# Altium PCB PCB1.PcbDoc
Units mm, origin at the board's own origin, x right, y up, seen from the top; angles counter-clockwise.
Board outline 26.5 x 24.9 mm, 2 copper layers (Top Layer, Bottom Layer); 36 components, 25 nets, 134 pads, 12 vias.
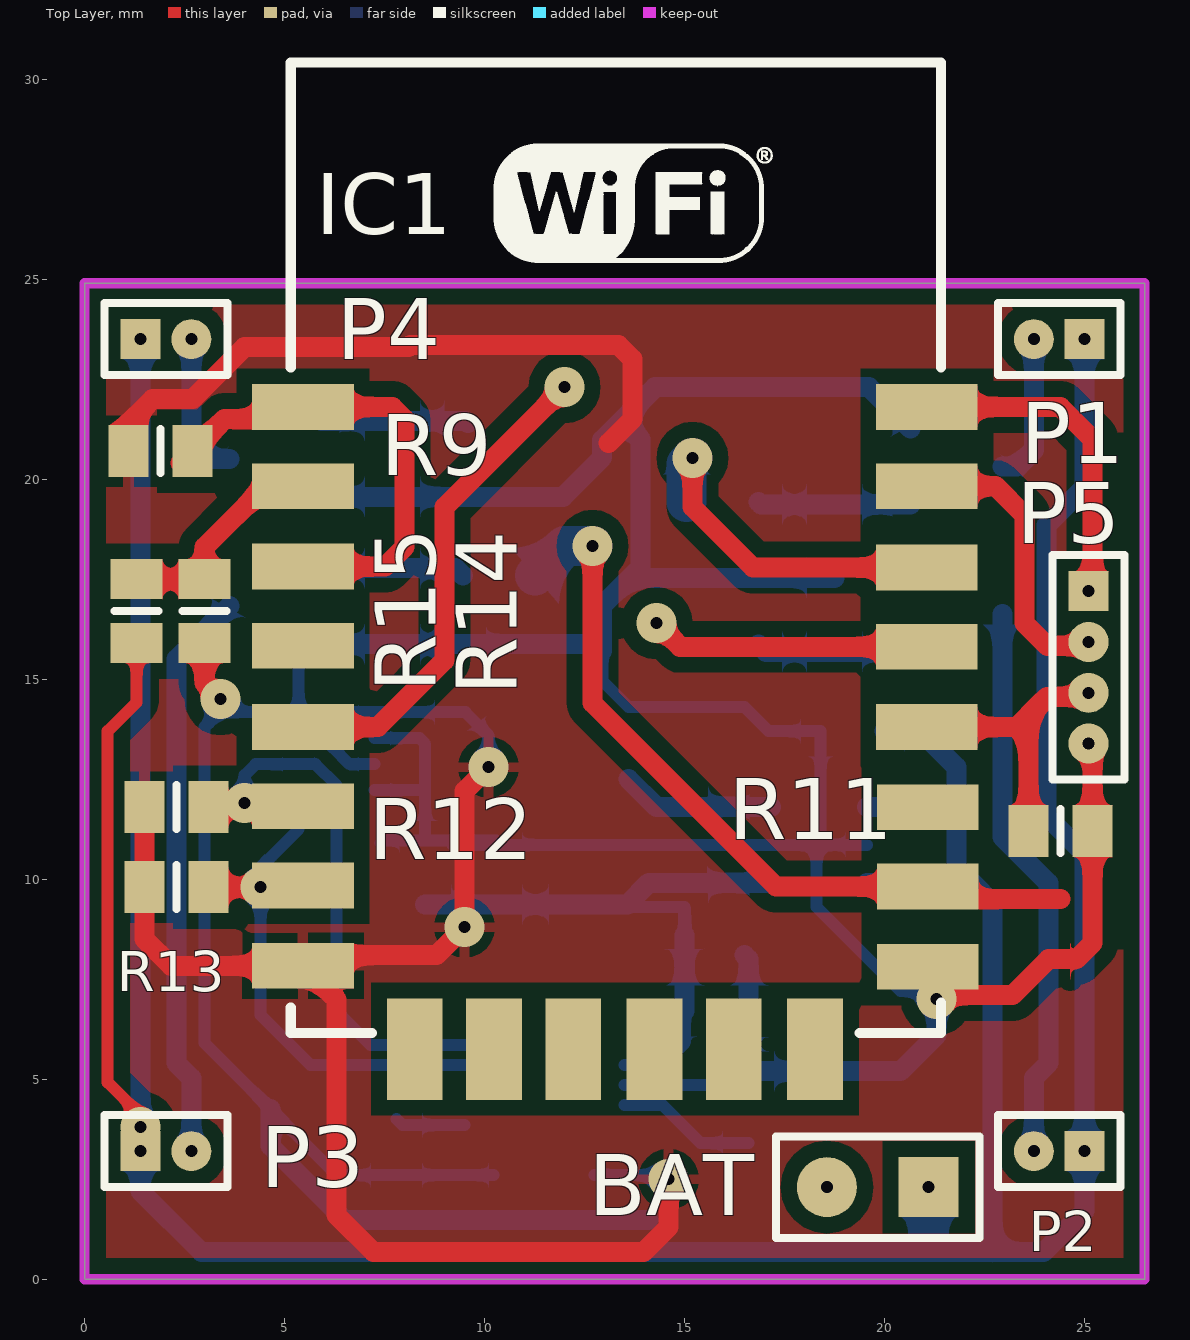
[diagram p0: Top Layer view]
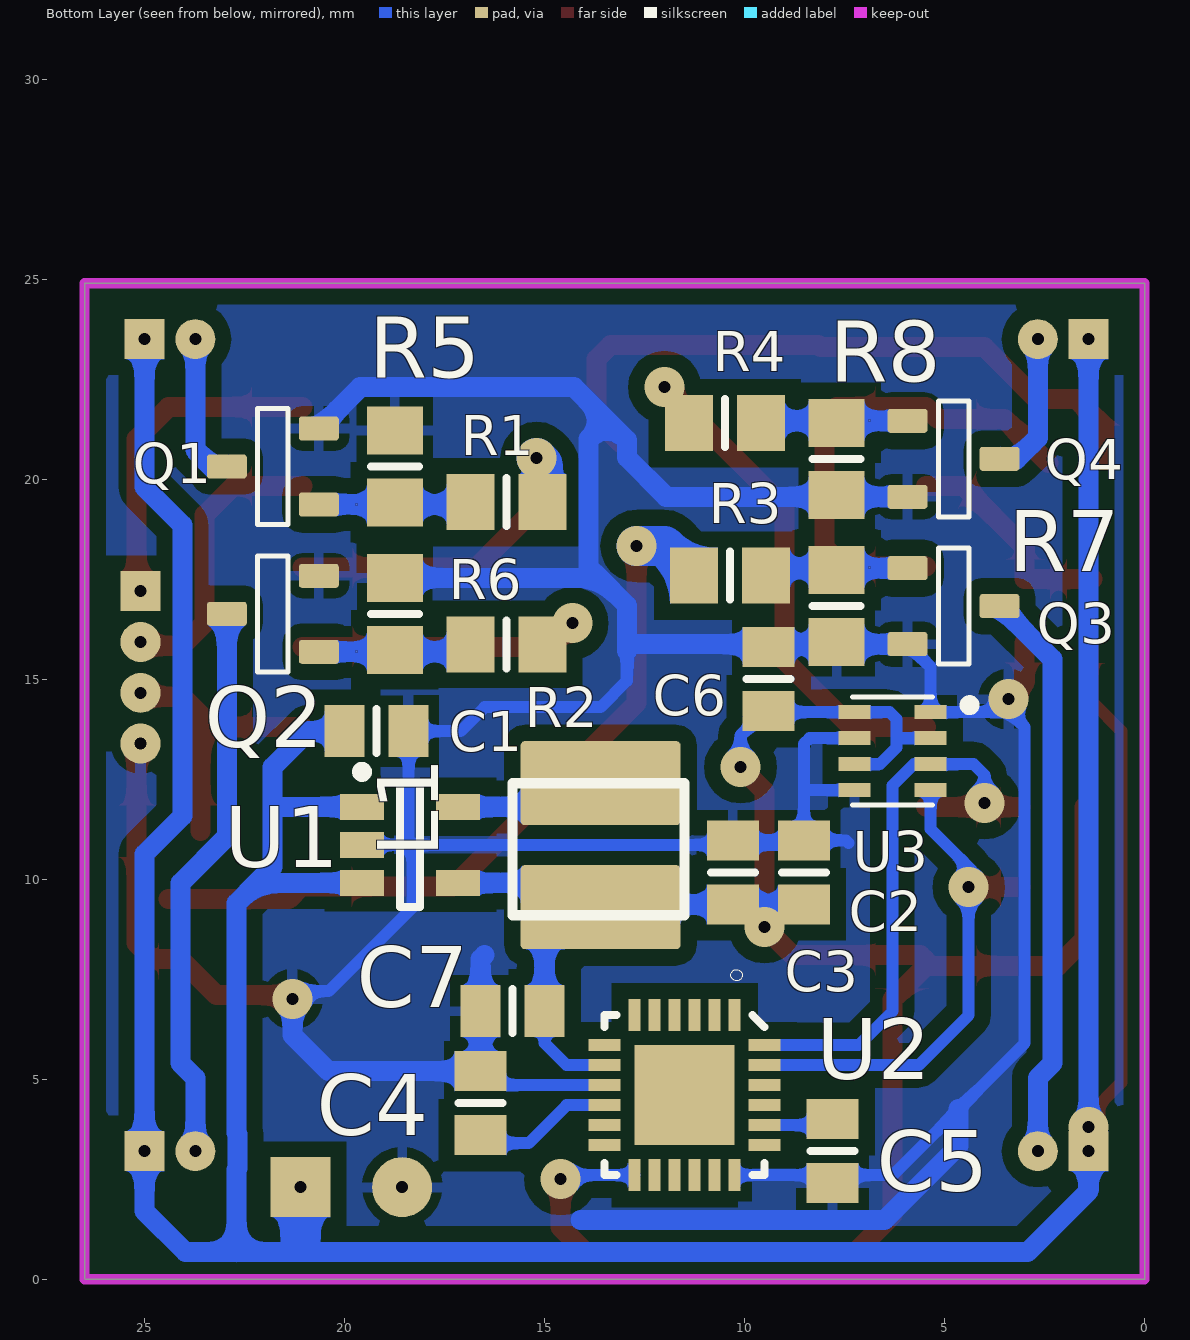
[diagram p1: Bottom Layer view, seen from below]

## Layer stack, top to bottom
Top Solder: solder mask 0.0102, Solder Resist, Dk 3.5
Top Layer: signal copper 0.0356
Dielectric 1: dielectric 0.32, FR-4, Dk 4.8
Bottom Layer: signal copper 0.0356
Bottom Solder: solder mask 0.0102, Solder Resist, Dk 3.5

## Board outline
0,0 26.5,0 26.5,24.9 0,24.9

## Design rules (kind name [scope] priority, off if disabled: settings)
Clearance [All] p1: gap=0.3 except(0.15: SMDPad-SMDPad; 0.2: Arc-SMDPad Track-SMDPad; 0.256: THPad-THPad; 0.4: Arc-Poly Track-Poly SMDPad-Poly THPad-Poly Via-Poly Fill-Poly Poly-Poly)
PolygonConnect [All] p1: connectstyle=Relief reliefconductorwidth=0.254 reliefentries=4 polygonreliefangle="90 Angle" airgapwidth=0.254
RoutingVias [All] p1: holewidth=0.711 width=1.27 viastyle="Through Hole" minholewidth=0.711 minwidth=1.27 maxholewidth=0.711 maxwidth=1.27
SolderMaskExpansion [All] p1: expansion=0.102
Width [All] p1: maxlimit=1 minlimit=0.254 preferedwidth=0.5
30 further rules are at their usual default settings.

## Components (designator, comment, footprint, x,y, rotation, side; value= is the part's Value field where it differs from the comment)
BAT "Header 2" HDR1X2 21.1,2.3 r180 top (schematic designator P6)
C1 "Cap" 6-0805_L 19.2,13.7 r0 bottom
C2 "Cap" 6-0805_L 8.517,10.169 r270 bottom
C3 "Cap" 6-0805_L 10.295,10.169 r270 bottom
C4 "Cap" 6-0805_L 16.6,4.4 r270 bottom
C5 "Cap" 6-0805_L 7.8,3.2 r90 bottom
C6 "Cap" 6-0805_L 9.4,15 r270 bottom
C7 "Cap" 6-0805_L 15.8,6.7 r180 bottom
IC1 "ESP8266 ESP-12-E" "ESP8266 ESP-12-E B" 22.047,5.396 r0 top
L1 "Inductor Iron Dot" "Inductor CD43" 11.6,13.4 r0 bottom
P1 "MHDR1X2" MHDR1X2 25,23.5 r180 top
P2 "MHDR1X2" MHDR1X2 25,3.2 r180 top
P3 "MHDR1X2" MHDR1X2 1.4,3.2 r0 top
P4 "MHDR1X2" MHDR1X2 1.4,23.5 r0 top
P5 "MHDR1X4" MHDR1X4 25.1,17.2 r270 top
Q1 "MOSFET-N" SOT23-3 21.793,20.317 r0 bottom
Q2 "MOSFET-N" SOT23-3 21.793,16.634 r0 bottom
Q3 "MOSFET-N" SOT23-3 4.775,16.826 r180 bottom
Q4 "MOSFET-N" SOT23-3 4.775,20.509 r180 bottom
R1 "Res3" 6-0805_N 15.951,19.428 r0 bottom
R2 "Res3" 6-0805_N 15.951,15.872 r0 bottom
R3 "Res3" 6-0805_N 10.363,17.588 r180 bottom
R4 "Res3" 6-0805_N 10.49,21.398 r180 bottom
R5 "Res3" 6-0805_N 18.745,20.317 r270 bottom
R6 "Res3" 6-0805_N 18.745,16.634 r270 bottom
R7 "Res3" 6-0805_N 7.696,16.826 r90 bottom
R8 "Res3" 6-0805_N 7.696,20.509 r90 bottom
R9 "Res3" 6-0805_L 1.9,20.7 r180 top
R11 "Res3" 6-0805_L 24.4,11.2 r180 top
R12 "Res3" 6-0805_L 2.3,11.8 r180 top
R13 "Res3" 6-0805_L 2.3,9.8 r0 top
R14 "Res3" 6-0805_L 3,16.7 r90 top
R15 "Res3" 6-0805_L 1.3,16.7 r270 top
U1 "LM3671MF-3.3/NOPB" MF05A_N 18.364,10.857 r180 bottom
U2 "MPU-6050" QFN50P400X400X95-25N 11.5,4.6 r270 bottom
U3 "BMP280" LGA-8_BMP280(Primary) 6.3,13.2 r180 bottom

## Footprints (in the part's own frame and the unit in brackets; to place one, negate y for a bottom-side part, rotate by r counter-clockwise, add the part's x,y. Pads: shape width x height; smd on the part's side, far side on the other; paste and mask are expansions set on the pad)
6-0805_L [mm] "Chip Resistor, Body 2.0x1.2mm, IPC High Density"
  rect 1x1.3 smd: 1(-0.8,0) 2(0.8,0)
  silkscreen extent 0,-0.55 0,0.55, body extent -1.07,-0.7 1.07,0.7, height 0.7
6-0805_N [mm] "Chip Resistor, Body 2.0x1.2mm, IPC Medium Density"
  rect 1.2x1.4 smd: 1(-0.9,0) 2(0.9,0)
  silkscreen extent 0,-0.6 0,0.6, body extent -1.07,-0.7 1.07,0.7, height 0.7
"ESP8266 ESP-12-E B" [mil] "ESP8266 ESP-12-E"
  rect 100x45 smd: 1(-653,646) 2(-653,568) 3(-653,489) 4(-653,411) 5(-653,331) 6(-653,253) 7(-653,175) 8(-653,96) 15(-38,95) 16(-38,174) 17(-38,252) 18(-39,331) 19(-39,410) 20(-39,488) 21(-39,568) 22(-39,646)
  rect 55x100 smd: 9(-543,14) 10(-465,14) 11(-387,14) 12(-307,14) 13(-229,14) 14(-149,14)
  silkscreen extent -665,30 -25,985
HDR1X2 [mm] "Connector; Header; 2 Position"
  rect 1.5x1.5 hole 0.3: 1(0,0)
  round 1.5 hole 0.3: 2(2.54,0)
  silkscreen extent -1.27,-1.27 3.81,1.27
"Inductor CD43" [mm] "4.5mm * 4mm"
  rrect10% 4x2.1 smd: 1(2,1) 2(2,4.1)
  silkscreen extent -0.1,1 4.2,4.3
LGA-8_BMP280(Primary) [mm]
  rect 0.8x0.35 smd paste-25.4 mask-25.4: 1(0.95,0.975) 2(0.95,0.325) 3(0.95,-0.325) 4(0.95,-0.975) 5(-0.95,-0.975) 6(-0.95,-0.325) 7(-0.95,0.325) 8(-0.95,0.975)
  silkscreen extent -1,-1.35 2.02,1.35
MF05A_N [mm] "SOT23, 5-Leads, Body 2.9x1.6mm, Pitch 0.95mm, Lead Span 2.8mm, IPC Medium Density"
  rect 1.1x0.65 smd: 1(-1.2,0.95) 2(-1.2,0) 3(-1.2,-0.95) 4(1.2,-0.95) 5(1.2,0.95)
  silkscreen extent -1.33,-1.55 0.25,1.95, body extent -0.9,-1.55 0.9,1.55, height 1.19
MHDR1X2 [mm] "Connector; Header; 2 Position"
  rect 1x1 hole 0.3: 1(0,0)
  round 1 hole 0.3: 2(1.27,0)
  silkscreen extent -0.9,-0.9 2.17,0.9
MHDR1X4 [mm] "Connector; Header; 4 Position"
  rect 1x1 hole 0.3: 1(0,0)
  round 1 hole 0.3: 2(1.27,0) 3(2.54,0) 4(3.81,0)
  silkscreen extent -0.9,-0.9 4.71,0.9
QFN50P400X400X95-25N [mm]
  rect 0.8x0.3 smd paste-25.4 mask-25.4: 1(-2,1.25) 2(-2,0.75) 3(-2,0.25) 4(-2,-0.25) 5(-2,-0.75) 6(-2,-1.25) 13(2,-1.25) 14(2,-0.75) 15(2,-0.25) 16(2,0.25) 17(2,0.75) 18(2,1.25)
  rect 0.3x0.8 smd paste-25.4 mask-25.4: 7(-1.25,-2) 8(-0.75,-2) 9(-0.25,-2) 10(0.25,-2) 11(0.75,-2) 12(1.25,-2) 19(1.25,2) 20(0.75,2) 21(0.25,2) 22(-0.25,2) 23(-0.75,2) 24(-1.25,2)
  rect 2.5x2.5 smd mask-25.4: 25(0,0)
  silkscreen extent -3.14,-2 2,2
SOT23-3 [mm] "SOT23, 3 pin"
  round 0.5 on Mech15: 0(0,0)
  rrect25% 1x0.6 smd: 1(-1.15,0.95) 2(-1.15,-0.95) 3(1.15,0)
  silkscreen extent -0.38,-1.45 0.38,1.45, body extent -1.4,-1.45 1.4,1.45, height 1.29

## Part data
BAT P1 P2 P3 P4: "Header, 2-Pin"
C1 C2 C3 C4 C5 C6 C7: "Capacitor"
L1: "Magnetic-Core Inductor with Winding Polarity Marking"
P5: "Header, 4-Pin"
Q1 Q2 Q3 Q4: "N-Channel MOSFET"
R1 R2 R3 R4 R5 R6 R7 R8 R9 R11 R12 R13 R14 R15: "Resistor"
U1: "2MHz, 600mA Step-Down DC-DC Converter, 5-pin SOT-23, Pb-Free"
U3: "Barometro"

## Via types
v1: diameter 1, hole 0.3, Top Layer to Bottom Layer, 11 vias
v2: diameter 1, hole 0.3, Top Layer to Bottom Layer, tented top, 1 vias

## Nets (pads, with @x,y where several pads share a name; then routed paths per layer and width w, separated by ;. In a path a pad name is that pad's centre, name@x,y a point inside that pad or via, vN(x,y) a via of type N, cw(c..) or ccw(c..) an arc to the next point about the centre after c; other vN are vias at no path point)
ADC: IC1.2 R14.2 R15.1 | length 5.6
  Top Layer w0.5: R15.1 R14.2 3,18.3 4.523,19.823 IC1.2
BOOT: IC1.18 P5.3 R11.2 | length 7.8
  Top Layer w0.5: IC1.18 23.303,13.803 ; R11.2 23.6,13.507 ; P5.3@25.2,14.56 24.06,14.56 23.6,14.1 ; 23.303,13.803 23.6,13.507 ; 23.303,13.803 23.6,14.1 ; 23.6,13.507 23.6,14.1
GND: BAT.2 C1.1 C2.1 C3.1 C4.1 C5.1 C6.1 C7.1 IC1.15 P5.4 Q1.2 Q2.2 Q3.2 Q4.2 R5.1 R6.1 R7.1 R8.1 R11.1 R14.1 U1.2 U2.9 U2.18 U3.1 U3.5 U3.7 | length 123.7
  Top Layer w0.3: v1@3.3,14.5 v1(3.4,14.5)
  Top Layer w0.5: R14.1 3,14.9 v1(3.4,14.5) ; v1@21.4,7.1 23.2,7.1 24.1,8 24.8,8 25.2,8.4 R11.1 P5.4@25.2,13.29
  Bottom Layer w0.3: v1@3.375,14.175 3,13.8 3,5.9 4.65,4.25 6.3,2.6 U2.18@10.225,2.6 ; v1@3.4,14.175 U3.1 5.35,15.301 Q3.2 ; U3.5 8.492,12.225 8.517,12.2 ; U3.7 8.375,13.525 8.517,13.383 8.517,12.2 ; 7.4,10.9 7.469,10.969 C2.1 ; 9.2,10.857 18.3,10.857 ; C3.1 C2.1 ; 12.924,15.876 12.941,15.859 ; 12.941,15.7 12.941,14.959 13.6,14.3 16.5,14.3 17.1,13.7 C1.1 18.4,10.957 18.3,10.857 ; U2.9 16.25,4.85 C4.1 ; U1.2 18.3,10.857 ; v1(21.3,7) 21.3,7.2 20.4,7.2 18.3,9.3 18.3,10.857 ; C2.1 8.517,12.2
  Bottom Layer w0.5: 4.65,4.25 4.65,3.328 6.5,1.478 14.1,1.478 ; Q3.2 12.924,15.876 ; Q4.2 11.959,19.559 12.941,20.541 12.941,20.975 13.433,21.467 ; 12.941,15.7 12.941,15.859 12.941,16.841 13.634,17.534 ; 16.5,8.1 16.6,8 C7.1 C4.1 20.4,5.2 21.3,6.1 v1(21.3,7) ; R6.1 13.634,17.534 ; Q1.2 19.61,22.3 14.266,22.3 13.433,21.467 ; 13.433,21.467 13.9,21 13.9,17.8 13.634,17.534
"MOTOR 0": P1.2 Q1.3 | length 3.7
  Bottom Layer w0.5: Q1.3 23.317,20.317 23.73,20.73 P1.2
"MOTOR 1": P2.2 Q2.3 | length 14.1
  Bottom Layer w0.5: Q2.3 22.943,11.057 24.1,9.9 24.1,5.4 23.73,5.03 P2.2
"MOTOR 2": P3.2 Q3.3 | length 14.3
  Bottom Layer w0.5: P3.2 2.67,5.03 2.3,5.4 2.3,15.501 Q3.3
"MOTOR 3": P4.2 Q4.3 | length 3.6
  Bottom Layer w0.5: P4.2 2.67,21.03 3.191,20.509 Q4.3
NetC4_2: C4.2 U2.10 | length 3.5
  Bottom Layer w0.3: U2.10 14.45,4.35 15.4,3.4 C4.2@16.6,3.4
NetC5_2: C5.2 U2.20 | length 1.8
  Bottom Layer w0.3: C5.2 7.95,3.85 U2.20
NetIC1_1: IC1.1 IC1.3 R9.1 | length 12.2
  Top Layer w0.5: R9.1@2.4,20.4 3.5,21.5 5.156,21.5 IC1.1 7.696,21.804 8,21.5 8,18.3 7.517,17.817 IC1.3
NetL1_1: L1.1 U1.5 | length 3.9
  Bottom Layer w0.5: L1.1@13.6,12.5 14.293,11.807 U1.5
NetQ1_2: Q1.1 R1.2 R5.2 | length 3.8
  Bottom Layer w0.5: R1.2 16.912,19.367 Q1.1
NetQ2_2: Q2.1 R2.2 R6.2 | length 3.9
  Bottom Layer w0.5: R2.2 17.039,15.684 Q2.1
NetQ3_2: Q3.1 R3.2 R7.2 | length 3.6
  Bottom Layer w0.5: Q3.1 9.275,17.776 R3.2
NetQ4_2: Q4.1 R4.2 R8.2 | length 3.7
  Bottom Layer w0.5: Q4.1 9.529,21.459 R4.2
PWM0: IC1.20 R1.1 | length 8.9
  Top Layer w0.5: v1(15.197,20.528) 15.197,19.303 16.709,17.791 IC1.20
  Bottom Layer w1: R1.1 15.051,20.382 v1(15.197,20.528)
PWM1: IC1.19 R2.1 | length 7
  Top Layer w0.5: v1(14.3,16.4) 14.89,15.81 IC1.19
PWM2: IC1.16 R3.1 | length 19.4
  Top Layer w0.5: v1(12.698,18.328) 12.698,14.402 17.284,9.816 IC1.16 21.397,9.5 24.4,9.5
  Bottom Layer w1: R3.1 12.003,18.328 v1(12.698,18.328)
PWM3: IC1.5 R4.1 | length 12.3
  Top Layer w0.5: IC1.5 7.331,13.803 9,15.473 9,19.3 v1(12,22.3)
RX: IC1.21 P5.2 | length 7.4
  Top Layer w0.5: IC1.21 22.777,19.823 23.5,19.1 23.5,16.4 24.07,15.83 P5.2@25.2,15.83
SCL: IC1.7 R13.2 U2.23 U3.4 | length 12.9
  Top Layer w0.5: R13.2 v1(4.4,9.8)
  Bottom Layer w0.3: U3.4 5.35,11.25 4.4,10.3 v1(4.4,9.8) 4.4,6.6 5.65,5.35 U2.23
SDA: IC1.6 R12.1 U2.24 U3.3 | length 14.9
  Top Layer w0.5: R12.1 5.439,11.8 IC1.6
  Bottom Layer w0.3: v1(4,11.9) 4,12.6 4.275,12.875 U3.3 5.77,12.875 6.3,12.345 6.3,6.7 7.15,5.85 U2.24
TX: IC1.22 P5.1 | length 8.4
  Top Layer w0.5: IC1.22 24.396,21.804 25.2,21 P5.1@25.2,17.1
VCC: C2.2 C3.2 C6.2 C7.2 IC1.8 L1.2 R9.2 R12.2 R13.1 U1.4 U2.8 U2.13 U3.2 U3.6 U3.8 | length 74.8
  Top Layer w0.3: IC1.8 IC1.8@5.461,7.961
  Top Layer w0.5: R9.2@1,20.6 1,21.3 1.7,22 2.7,22 4,23.3 8.1,23.3 8.15,23.35 13.35,23.35 13.7,23 13.7,21.5 13.1,20.9 ; R12.2 1.5,8.5 2.166,7.834 IC1.8 6.3,6.995 6.3,1.6 7.222,0.678 13.978,0.678 14.6,1.3 v1(14.6,2.5) ; IC1.8@5.461,7.961 5.6,8.1 8.8,8.1 v2(9.5,8.8) 9.5,12.2 v1(10.1,12.8)
  Bottom Layer w0.3: U3.2 6.175,13.525 6.2,13.5 ; U3.6 6.619,12.875 6.2,13.293 6.2,13.5 ; v1(10.1,12.8) 10.1,13.593 9.518,14.175 U3.8 6.375,14.175 6.2,14 6.2,13.5 ; U2.13 14.5,2.6 v1(14.6,2.5) ; U2.8 14.45,5.35 15,5.9 C7.2 ; L1.2 15,9.3 L1.2@15,8.6
  Bottom Layer w0.5: C2.2 C3.2 13.569,9.369 14.107,9.907 U1.4 ; C7.2 L1.2@15,8.6
VCC_BAT: BAT.1 C1.2 P1.1 P2.1 P3.1 P4.1 R15.2 U1.1 U1.3 | length 104
  Top Layer w0.3: R15.2 1.3,14.422 0.578,13.7 0.578,4.922 1.4,4.1 P3.1
  Bottom Layer w0.5: P4.1 P3.1 1.4,2.2 2.922,0.678 22.7,0.678 ; U1.3 22.193,9.907 ; U1.1 21.793,11.807 21.8,11.8 ; C1.2 20.9,13.7 21.8,12.8 21.8,11.8 ; 23.9,0.678 22.7,0.678 ; P1.1 25,19.8 24.05,18.85 24.05,11.581 25,10.631 P2.1 25,1.7 23.978,0.678 22.7,0.678 ; 21.8,11.8 21.8,10.3 22.193,9.907 ; 22.193,9.907 22.7,9.4 22.7,3.655 22.68,3.635 22.68,2.765 22.7,2.745 22.7,0.678
  Bottom Layer w1: 21.1,1 BAT.1@21.1,2.4
  other v1: 1.4,3.8
pads on no net: IC1.4 IC1.9 IC1.10 IC1.11 IC1.12 IC1.13 IC1.14 IC1.17 Q1.0 Q2.0 Q3.0 Q4.0 U2.1 U2.2 U2.3 U2.4 U2.5 U2.6 U2.7 U2.11 U2.12 U2.14 U2.15 U2.16 U2.17 U2.19 U2.21 U2.22 U2.25

## Polygon pours and split planes (outlines as drawn)
GND on Bottom Layer "Plano_GND" (solid, pour order 0): 0,24.9 26.5,24.9 26.5,0 0,0
VCC on Top Layer "Plano_VCC" (solid, pour order 2): 0,24.9 0,0 26.5,0 26.5,24.9

## Keep-outs
Keep-Out Layer:
  the board outline again, w0.256

## Text inside footprints (layer, text, board x,y; h text height)
IC1: Mechanical 13 "ANTENNA AREA" at 5.462,29.795 h0.25; Mechanical 13 "CUTOUT POLYGON" at 5.462,29.287 h0.25